# Altium PCB v009 pcb.PCBDOC
Units mm, origin at the board's own origin, x right, y up, seen from the top; angles counter-clockwise.
Board outline 21.5 x 5.6 mm, 2 copper layers (Top Layer, Bottom Layer); 12 components, 30 nets, 84 pads, 35 vias.
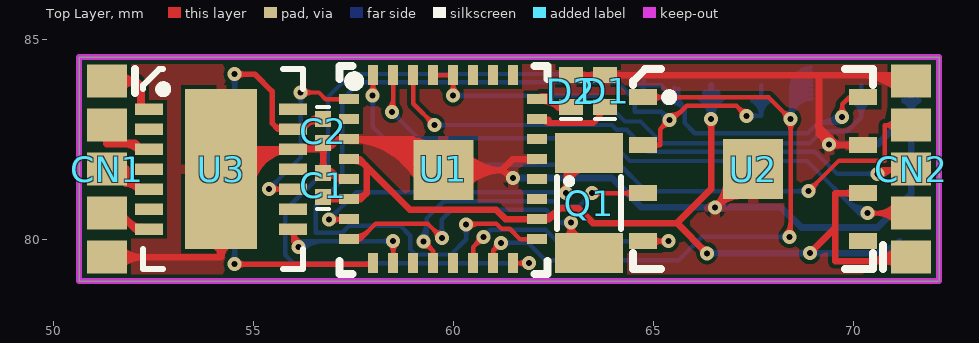
[diagram p0: Top Layer view]
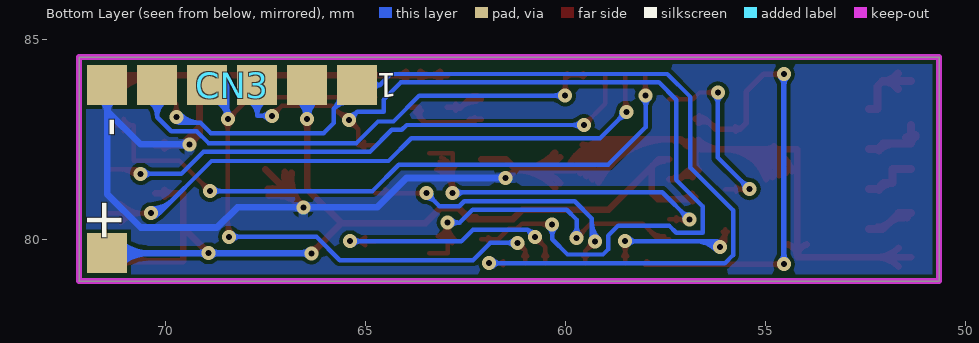
[diagram p1: Bottom Layer view, seen from below]

## Layer stack, top to bottom
Top Layer: signal copper 0.0356
Dielectric: core 0.32, FR-4, Dk 4.8
Bottom Layer: signal copper 0.0356

## Board outline
50.65,78.95 72.15,78.95 72.15,84.55 50.65,84.55

## Design rules (kind name [scope] priority, off if disabled: settings)
Clearance Clearance_Pad [All vs IsPad] p1: gap=0.1
Clearance Clearance_Via [(IsVia) vs (IsVia)] p2 off: gap=0.1
Clearance Polygon [InPoly vs IsPad] p3: gap=0.1
Clearance [All] p4: gap=0.1
DiffPairsRouting [All] p1: maxlimit=0.2 minlimit=0.2 mostfreqgap=0.2 maxuncoupledlength=0.2
FabricationTestPointUsage TestPointUsage [All] p1: valid=0 allowmultiple=FALSE
FabricationTestpoint Testpoint [All] p1: side=3 testpointundercomponent=TRUE minsize=1.016 maxsize=2.54 preferedsize=1.524 minholesize=0 maxholesize=1.016 preferedholesize=0.813 testpointgrid=0.025 allowsidetop=TRUE allowsidebottom=TRUE usegrid=TRUE gridtolerance=0
HoleSize [All] p1: absolutevalues=TRUE maxlimit=2.54 minlimit=0.15 maxpercent=80.000 minpercent=20.000
HoleToHoleClearance [All] p1: gap=0.15 allowstackedmicrovias=FALSE
MinimumAnnularRing [All] p1: minimumring=0.1
MinimumSolderMaskSliver [All] p1 off: minsoldermaskwidth=0.1
PolygonConnect [All] p1: connectstyle=Relief reliefconductorwidth=0.254 reliefentries=4 polygonreliefangle="90 Angle"
RoomDefinition "v009 schematics" [InComponentClass('v009 schematics')] p1: confinementstyle=ConfineIn formatcopy=TRUE lockcomponents=FALSE outline 48.05,77.9 73.1,77.9 73.1,85.4 48.05,85.4
RoutingCorners [All] p1: cornerstyle=Round minsetback=1 maxsetback=1
RoutingVias [All] p1: holewidth=0.15 width=0.35 viastyle="Through Hole" minholewidth=0.15 minwidth=0.35 maxholewidth=0.15 maxwidth=0.35
SMDNeckDown [All] p1: percent=100.000
SilkscreenOverComponentPads [All] p1 off: minsilkscreentomaskgap=0.254
SolderMaskExpansion SolderMaskExpansion_1 [(IsVia)] p1: expansion=-0.2
SolderMaskExpansion [All] p2: expansion=0.02
Width Width_3 [(InNet('PD5') OR InNet('PC0') OR InNet('PC1') OR InNet('NetGreen Led_1'))] p1: maxlimit=0.14 minlimit=0.14 preferedwidth=0.14
Width Width_2 [(InNet('HEAD 1') OR InNet('HEAD 2') OR InNet('HEAD 3') OR InNet('HCOMMON'))] p2: maxlimit=0.2 minlimit=0.2 preferedwidth=0.2
Width Width_1 [(InNet('GND') OR InNet('VCC'))] p3: maxlimit=0.17 minlimit=0.17 preferedwidth=0.17
Width [All] p4: maxlimit=0.11 minlimit=0.11 preferedwidth=0.11
20 further rules are at their usual default settings.

## Components (designator, comment, footprint, x,y, rotation, side; value= is the part's Value field where it differs from the comment)
+ "No component mounted" SU01LS 71.5,79.3 r0 bottom (schematic designator VCC)
C1 "100nF" CC0603(0201) 56.6,81.05 r90 top
C2 "100nF" CC0603(0201) 56.9,83 r270 top
CN1 "5pin smd" "SU05LSR WIDE" 51.35,83.95 r270 top
CN2 "5pin smd" "SU05LSR WIDE" 71.45,79.55 r90 top
CN3 "No component mounted" "SU06LST FULL" 64.6,83.25 r0 bottom
D1 "LED1" CC1005(0402) 63.55,83.2 r90 top
D2 "LED1" CC1005(0402) 62.7,83.2 r90 top
Q1 "32.768khz crystal 1.5 x 3.2mm" "QUARTZ SMD (SMALL)" 64.3,82.65 r270 top
U1 "ATMEL ATMEGA168V-10MU-ND" "32M1-A L 3" 57.15,84.35 r0 top
U2 "ATMEL 4MBit DataFlash" "8M1-A MLF 3" 64.5,84.25 r0 top
U3 "Asic 3V MLF14" "DELTA ASIC - 5" 56.25,84.25 r270 top

## Footprints (in the part's own frame and the unit in brackets; to place one, negate y for a bottom-side part, rotate by r counter-clockwise, add the part's x,y. Pads: shape width x height; smd on the part's side, far side on the other; paste and mask are expansions set on the pad)
"8M1-A MLF 3" [mm] "for at45db161d"
  rect 0.7x0.4 smd: 1(0.25,-0.7) 2(0.25,-1.9) 3(0.25,-3.1) 4(0.25,-4.3) 5(5.75,-4.3) 6(5.75,-3.1) 7(5.75,-1.9) 8(5.75,-0.7)
  rect 1.5x1.5 smd: 9(3,-2.5)
  silkscreen extent 0,-5 6,0, body extent 0,-5 6,0, height 1
"32M1-A L 3" [mm] "atmel uc modified"
  rect 0.5x0.25 smd: 1(0.25,-0.85) 2(0.25,-1.35) 3(0.25,-1.85) 4(0.25,-2.35) 5(0.25,-2.85) 6(0.25,-3.35) 7(0.25,-3.85) 8(0.25,-4.35) 17(4.95,-4.35) 18(4.95,-3.85) 19(4.95,-3.35) 20(4.95,-2.85) 21(4.95,-2.35) 22(4.95,-1.85) 23(4.95,-1.35) 24(4.95,-0.85)
  rect 0.25x0.5 smd: 9(0.85,-4.95) 10(1.35,-4.95) 11(1.85,-4.95) 12(2.35,-4.95) 13(2.85,-4.95) 14(3.35,-4.95) 15(3.85,-4.95) 16(4.35,-4.95) 25(4.35,-0.25) 26(3.85,-0.25) 27(3.35,-0.25) 28(2.85,-0.25) 29(2.35,-0.25) 30(1.85,-0.25) 31(1.35,-0.25) 32(0.85,-0.25)
  rect 1.5x1.5 smd: 33(2.607,-2.624)
  silkscreen extent 0.01,-5.22 5.21,-0.02, body extent 0.1,-5.1 5.1,-0.1, height 1
CC0603(0201) [mm]
  rect 0.4x0.4 smd: 1(0,-0.15) 2(0.6,-0.15)
  silkscreen extent -0.3,-0.3 -0.3,0, body extent 0,-0.3 0.6,0, height 1
CC1005(0402) [mm]
  rect 0.4x0.6 smd: 1(0.1,-0.25) 2(0.9,-0.25)
  silkscreen extent -0.2,-0.5 -0.2,0, body extent 0,-0.5 1,0, height 1
"DELTA ASIC - 5" [mm]
  rect 0.28x0.7 smd: 1(1,-3.85) 2(1.5,-3.85) 3(2,-3.85) 4(2.5,-3.85) 5(3,-3.85) 6(3.5,-3.85) 7(4,-3.85) 8(4,-0.25) 9(3.5,-0.25) 10(3,-0.25) 11(2.5,-0.25) 12(2,-0.25) 13(1.5,-0.25) 14(1,-0.25)
  rect 4x1.8 smd: 15(2.5,-2.05)
  silkscreen extent 0,-4 5,0, body extent 0,-4 5,0, height 0.7
"QUARTZ SMD (SMALL)" [mm] "CC7V-T1A"
  rect 1x1.7 smd: 1(0.5,-0.9) 2(3,-0.9)
  silkscreen extent 1.1,-1.7 2.4,-0.1, body extent 0.1,-1.65 3.3,-0.15, height 0.5
SU01LS [mm]
  rect 1x1 smd: 1(-0.05,-0.35)
"SU05LSR WIDE" [mm] "0.95mm spacing"
  rect 0.825x1 smd: 1(0,0) 2(1.1,0) 3(2.2,0) 4(3.3,0) 5(4.4,0)
  silkscreen extent -0.3,0.7 0.3,0.7
"SU06LST FULL" [mm]
  rect 1x1 smd: 1(0.6,-0.6) 2(1.85,-0.6) 3(3.1,-0.6) 4(4.35,-0.6) 5(5.6,-0.6) 6(6.85,-0.6)

## Part data
+: library part "1pin smd"
C1 C2: library part Cap, "100nf Capacitor - Footprint CC0603 (0201)"
CN1 CN2: "No component mounted"
CN3: library part "6pin smd"
D1: library part LED3, "LED 0402 GREEN 465NM TRANSPARENT"
D2: library part LED3, "LED 0402 RED 465NM TRANSPARENT"
Q1: library part "2pin smd", "CRYSTAL 32.768KHZ 1.5 x 3.2mm"
U1: library part ATmega8L-8MC, "ATMEL ATMEGA168V-10MU"
U2: library part at45db041b
U3: library part "delta asic 3volt"

## Via types
v1: diameter 0.35, hole 0.15, Top Layer to Bottom Layer, 35 vias

## Nets (pads, with @x,y where several pads share a name; then routed paths per layer and width w, separated by ;. In a path a pad name is that pad's centre, name@x,y a point inside that pad or via, vN(x,y) a via of type N, cw(c..) or ccw(c..) an arc to the next point about the centre after c; other vN are vias at no path point)
ADC6: U1.19
ADC7: U1.22
GND: C1.2 C2.2 CN1.5 CN2.5 CN3.6 D1.2 D2.2 U1.3 U1.5 U1.21 U1.33 U2.7 U2.9 U3.12 U3.15 | length 85.1
  Top Layer w0.17: CN1.5 54.2,79.55 ; CN1.5@51.669,79.318 cw(c52.228,78.759) 52.228,79.55 cw(c52.228,80.341) CN1.5@51.669,79.782 ; U3.15@53.963,79.87 cw(c53.865,79.55) 54.2,79.55 ; U3.15@54.329,81.709 cw(c55.069,81.473) U3.15@55.069,82.25 ; U3.15@54.437,79.87 ccw(c54.535,79.55) 54.2,79.55 ; U3.15@54.491,81.657 cw(c55.302,81.398) 55.302,82.25 ; U3.15@54.653,81.606 cw(c55.535,81.324) 55.535,82.25 ; U3.15@54.776,82.326 ccw(c54.961,82.511) U3.15@54.961,82.25 ; U3.15@54.814,81.554 cw(c55.767,81.25) U3.12@55.767,82.25 ; U3.15@54.976,81.502 cw(c56,81.176) U3.12 ; U3.12@56.11,82.25 ccw(c56.11,83.04) C2.2@56.669,82.481 ; 56.52,82.25 ccw(c56.52,82.63) C2.2@56.789,82.361 ; C1.2@56.669,81.731 ccw(c56.472,81.928) 56.75,81.928 ccw(c57.028,81.928) C1.2@56.831,81.731 ; C2.2@56.669,82.319 cw(c56.472,82.122) 56.75,82.122 cw(c57.028,82.122) C2.2@56.831,82.319 ; C2.2@56.714,82.358 ccw(c56.847,82.515) 56.992,82.37 ; C1.2@56.719,81.695 cw(c56.833,81.528) 56.976,81.671 ; C1.2@56.741,81.704 cw(c56.798,81.368) 57.038,81.609 ; C1.2@56.815,81.555 cw(c56.951,81.356) 57.121,81.526 ; C2.2@56.824,82.488 ccw(c56.967,82.656) 57.123,82.5 ; C2.2@56.832,82.32 cw(c57.023,82.134) 57.023,82.4 ; C2.2@56.832,82.48 ccw(c57.023,82.666) 57.023,82.4 ; C1.2@56.838,81.576 cw(c56.998,81.441) 56.998,81.65 ; C1.2@56.838,81.724 ccw(c56.998,81.859) 56.998,81.65 ; 57.047,82.424 cw(c57.182,82.289) U1.3@57.259,82.463 ; 57.061,81.586 ccw(c57.201,81.726) U1.5@57.263,81.538 ; U1.5 57.148,81.5 56.998,81.65 ; 57.679,82.5 cw(c57.679,80.658) U1.33@59.317,81.5 ; 57.957,82.5 cw(c57.957,80.801) U1.33@59.468,81.577 ; 58.235,82.5 cw(c58.235,80.944) U1.33@59.619,81.655 ; 58.514,82.5 cw(c58.514,81.087) U1.33@59.77,81.733 ; 58.792,82.5 cw(c58.792,81.23) U1.33@59.922,81.811 ; U1.33@59.123,81.927 ccw(c58.581,82.098) 58.983,82.5 ; U1.33@59.165,81.422 ccw(c57.4,80.515) U1.3 ; U1.33@59.285,81.875 ccw(c58.882,82.003) 59.181,82.302 ccw(c59.48,82.601) U1.33@59.608,82.198 ; U1.33@59.556,82.36 cw(c59.385,82.902) 58.983,82.5 ; U1.33@60.13,81.401 cw(c60.845,80.777) 60.845,81.726 cw(c60.845,82.675) U1.33@60.13,82.051 ; U1.33@60.258,81.289 cw(c61.219,80.451) 61.219,81.726 ; U1.33@60.258,82.163 ccw(c61.219,83.001) 61.219,81.726 ; v1@61.405,81.518 ccw(c61.191,81.481) 61.315,81.659 ccw(c61.44,81.837) v1@61.478,81.623 ; v1(61.493,81.534) 61.219,81.726 ; U1.21 61.493,82 61.219,81.726 ; D2.2 63.398,84.1 63.85,84.1 67.846,84.1 71.3,84.1 CN2.5 ; D2.2@63.131,84.019 cw(c63.328,83.822) 63.328,84.1 cw(c63.328,84.378) D2.2@63.131,84.181 ; 63.422,84.1 ccw(c63.422,84.378) D1.2@63.619,84.181 ; 63.423,84.1 cw(c63.423,83.823) D1.2@63.619,84.019 ; D1.2@63.981,84.019 cw(c64.177,83.823) 64.177,84.1 ; D1.2@63.981,84.181 ccw(c64.178,84.378) 64.178,84.1 ; v1@66.548,80.888 ccw(c66.548,81.105) 66.701,80.951 ccw(c66.855,80.798) v1@66.638,80.798 ; U2.9@66.841,81.662 cw(c65.819,81.527) v1(66.548,80.798) ; U2.9@67.009,81.685 cw(c66.248,81.584) 66.791,81.041 cw(c67.334,80.498) U2.9@67.435,81.259 ; U2.9@67.412,81.091 ccw(c67.277,80.069) v1(66.548,80.798) ; U2.9 v1(66.548,80.798) ; 69.119,82.827 cw(c68.664,82.372) 69.307,82.372 ccw(c69.09,82.372) 69.244,82.526 ccw(c69.397,82.679) v1@69.397,82.462 ; 69.143,84.1 69.143,82.803 ; v1(69.397,82.372) 69.143,82.626 69.143,82.803 ; v1@69.461,82.436 ccw(c69.668,82.643) 69.668,82.35 ; v1@69.474,82.419 ccw(c69.596,82.492) 69.596,82.35 ; U2.7@70.019,82.269 ccw(c69.822,82.072) 69.822,82.35 ccw(c69.822,82.628) U2.7@70.019,82.431 ; 70.21,84.1 cw(c70.21,82.797) CN2.5@71.131,83.718 ; U2.7 69.596,82.35 ; 70.62,84.1 cw(c70.62,83.208) CN2.5@71.251,83.839 ; 70.934,84.1 ccw(c70.934,84.379) CN2.5@71.131,84.182 ; 54.2,79.55 U3.15 54.2,82.25 U3.12 ; U3.12 56.6,82.25 C2.2 ; C2.2 57.023,82.4 ; C2.2 56.75,82.017 C1.2 56.998,81.65 ; 57.023,82.4 57.123,82.5 ; 57.123,82.5 U1.3 ; U1.3 58.983,82.5 ; 58.983,82.5 U1.33 61.219,81.726 ; 69.143,82.803 69.596,82.35
  Bottom Layer w0.17: v1(61.493,81.534) 63.966,81.534 64.702,80.798 v1(66.548,80.798) 68.199,80.798 68.707,80.289 70.612,80.289 71.45,81.127 71.45,83.21 ; v1@61.557,81.47 cw(c61.711,81.317) 61.711,81.534 cw(c61.711,81.751) v1@61.557,81.598 ; v1@66.484,80.734 ccw(c66.33,80.58) 66.33,80.798 ccw(c66.33,81.015) v1@66.484,80.861 ; v1@66.611,80.734 cw(c66.765,80.58) 66.765,80.798 cw(c66.765,81.015) v1@66.611,80.861 ; v1(69.397,82.372) 70.612,82.372 71.45,83.21 ; v1@69.461,82.309 cw(c69.614,82.155) 69.614,82.372 cw(c69.614,82.589) v1@69.461,82.436 ; CN3.6@71.281,83.471 cw(c71.164,83.21) 71.45,83.21 ; CN3.6 71.45,83.21 ; CN3.6@71.619,83.471 ccw(c71.736,83.21) 71.45,83.21
HCOMMON: CN1.1 U3.1 | length 2.6
  Top Layer w0.2: CN1.1 52.07,83.95 ; CN1.1@51.686,83.76 cw(c52.07,83.466) 52.07,83.95 ; CN1.1@51.686,84.14 ccw(c52.07,84.434) 52.07,83.95 ; U3.1 52.197,83.25 52.197,83.823 52.07,83.95
"HEAD 1": CN1.2 U3.3 | length 2.9
  Top Layer w0.2: CN1.2@51.239,82.558 cw(c51.179,82.398) 51.35,82.398 ; CN1.2@51.245,82.604 cw(c51.078,82.389) 51.35,82.389 cw(c51.503,82.389) CN1.2@51.481,82.541 ; CN1.2 51.35,82.398 ; CN1.2@51.461,82.558 ccw(c51.521,82.398) 51.35,82.398 ; 51.737,82.398 cw(c51.737,81.797) U3.3@52.162,82.222 ; U3.3 52.197,82.25 52.049,82.398 51.35,82.398
"HEAD 2": CN1.3 U3.5 | length 1.9
  Top Layer w0.2: CN1.3 51.816,81.75 CN1.3@51.816,81.407 ; U3.5@52.157,81.227 ccw(c51.816,80.994) CN1.3@51.816,81.407 ; U3.5 52.197,81.25 52.04,81.407 CN1.3@51.816,81.407
"HEAD 3": CN1.4 U3.7 | length 2
  Top Layer w0.2: CN1.4 51.664,80.65 52.064,80.25 U3.7 ; CN1.4@51.459,80.54 cw(c51.556,80.047) 51.912,80.402 ; 51.906,80.408 ccw(c52.19,80.692) U3.7@52.19,80.29
PB0: U1.12 U2.3 | length 9.9
  Top Layer w0.11: v1@59.258,79.827 cw(c59.258,79.538) 59.463,79.742 cw(c59.668,79.947) v1@59.378,79.947 ; v1(59.258,79.947) 59.5,79.705 U1.12 ; U1.12@59.451,79.574 ccw(c59.331,79.694) 59.5,79.694 ccw(c59.669,79.694) U1.12@59.55,79.574 ; v1(63.472,81.15) U2.3 ; v1@63.556,81.065 cw(c63.761,80.86) 63.761,81.15 cw(c63.761,81.44) v1@63.556,81.235 ; U2.3@64.497,81.047 ccw(c64.25,80.8) 64.25,81.15 ccw(c64.25,81.5) U2.3@64.497,81.253
  Bottom Layer w0.11: v1@59.173,80.032 ccw(c58.785,80.421) 59.334,80.421 ; v1@59.251,79.954 ccw(c59.05,80.155) 59.334,80.155 ; v1(59.258,79.947) 59.334,80.023 59.334,80.518 59.763,80.946 62.526,80.946 62.649,80.823 63.144,80.823 v1(63.472,81.15) ; v1@63.352,81.15 cw(c63.062,81.15) 63.267,80.945 cw(c63.472,80.74) v1@63.472,81.03
PB1: U1.13
PB2: U1.14 U2.4 | length 8.8
  Top Layer w0.11: U1.14@60.451,79.574 ccw(c60.331,79.694) 60.5,79.694 ccw(c60.669,79.694) U1.14@60.55,79.574 ; U1.14 60.5,79.804 v1(60.757,80.061) ; v1@60.637,80.061 cw(c60.347,80.061) 60.552,79.856 cw(c60.757,79.651) v1@60.757,79.941 ; U2.4 v1(65.38,79.95) ; U2.4@65.003,79.847 cw(c65.25,79.6) 65.25,79.95 cw(c65.25,80.3) U2.4@65.003,80.053 ; v1@65.295,79.865 ccw(c65.09,79.66) 65.09,79.95 ccw(c65.09,80.24) v1@65.295,80.035
  Bottom Layer w0.11: v1(60.757,80.061) 60.935,80.239 ; v1@60.769,80.18 ccw(c60.791,80.382) 60.935,80.239 ; v1@60.876,80.073 cw(c61.078,80.095) 60.935,80.239 ; v1@65.295,79.865 ccw(c65.09,79.66) 65.09,79.95 ccw(c65.09,80.24) v1@65.295,80.035 ; v1(65.38,79.95) 62.595,79.95 62.306,80.239 60.935,80.239
PB3: CN3.4 U1.15 U2.1 | length 26.7
  Top Layer w0.11: U1.15@60.95,79.574 ccw(c60.831,79.694) 61,79.694 ccw(c61.169,79.694) U1.15@61.049,79.574 ; U1.15 61,79.72 ; v1@61.069,79.901 cw(c60.833,79.887) 61,79.72 ; v1@61.181,79.789 ccw(c61.167,79.553) 61,79.72 ; v1(61.189,79.908) 61,79.72 ; U2.1 67.885,83.55 v1(68.434,83.001) 68.434,80.093 v1(68.402,80.061) ; U2.1@65.003,83.447 cw(c65.25,83.2) 65.25,83.55 cw(c65.25,83.9) U2.1@65.003,83.653 ; v1@68.314,83.001 ccw(c68.024,83.001) 68.229,83.206 ccw(c68.434,83.411) v1@68.434,83.121 ; v1@68.317,80.146 ccw(c68.036,80.427) 68.434,80.427 ; v1@68.349,82.916 cw(c68.144,82.711) 68.434,82.711 cw(c68.724,82.711) v1@68.519,82.916 ; 68.434,80.274 ccw(c68.615,80.274) v1@68.487,80.146
  Bottom Layer w0.11: v1(61.189,79.908) 61.874,79.908 62.306,79.477 65.634,79.477 66.218,80.061 v1(68.402,80.061) ; v1@61.273,79.824 cw(c61.478,79.619) 61.478,79.908 cw(c61.478,80.198) v1@61.273,79.993 ; v1@68.317,79.976 ccw(c68.112,79.771) 68.112,80.061 ccw(c68.112,80.351) v1@68.317,80.146 ; v1@68.349,83.086 ccw(c68.098,83.336) 68.453,83.336 ; v1(68.434,83.001) 68.453,83.02 68.453,83.85 CN3.4 ; v1@68.453,82.995 cw(c68.973,82.995) CN3.4@68.959,83.515 ; v1@68.453,83.108 cw(c68.97,83.108) CN3.4@68.956,83.625 ; 68.453,83.221 cw(c68.967,83.221) CN3.4@68.953,83.735 ; 68.453,83.245 ccw(c68.678,83.245) v1@68.519,83.086 ; 68.453,83.334 cw(c68.964,83.334) CN3.4@68.95,83.845 ; CN3.4@68.453,83.447 cw(c68.961,83.447) CN3.4@68.947,83.955 ; CN3.4@68.453,83.56 cw(c68.958,83.56) CN3.4@68.944,84.065 ; CN3.4@68.453,83.673 cw(c68.955,83.673) CN3.4@68.941,84.175 ; CN3.4@68.453,83.786 cw(c68.952,83.786) CN3.4@68.938,84.285
PB4: CN3.1 U1.16 U2.8 | length 31.4
  Top Layer w0.11: U1.16 v1(61.9,79.4) ; U1.16@61.55,79.35 cw(c61.67,79.23) 61.67,79.4 ; U1.16@61.55,79.449 ccw(c61.668,79.568) 61.668,79.4 ; v1@61.815,79.316 ccw(c61.61,79.111) 61.61,79.4 ccw(c61.61,79.69) v1@61.815,79.485 ; v1@69.638,83.143 ccw(c69.433,83.348) 69.723,83.348 ccw(c70.013,83.348) v1@69.808,83.143 ; v1(69.723,83.058) 69.723,83.372 69.901,83.55 U2.8 ; 69.768,83.418 cw(c70.022,83.164) U2.8@70.093,83.516
  Bottom Layer w0.11: v1@61.815,79.316 ccw(c61.61,79.111) 61.61,79.4 ccw(c61.61,79.69) v1@61.815,79.485 ; v1(61.9,79.4) 56.007,79.4 55.804,79.604 55.804,80.721 56.871,81.788 56.871,83.554 57.448,84.131 64.353,84.131 64.635,83.85 ; CN3.1@64.767,83.745 ccw(c64.635,83.713) 64.635,83.85 ; CN3.1@64.767,83.954 cw(c64.635,83.987) 64.635,83.85 ; CN3.1@65.267,83.522 cw(c65.349,83.116) 65.641,83.409 cw(c65.934,83.701) CN3.1@65.528,83.783 ; CN3.1@65.288,83.414 cw(c65.398,82.875) 65.786,83.264 ; CN3.1@65.636,83.761 ccw(c66.174,83.652) 65.786,83.264 ; 69.118,82.912 ccw(c69.118,83.614) v1@69.635,83.139 ; 69.368,82.912 ccw(c69.368,83.384) v1@69.716,83.065 ; 69.619,82.912 ccw(c69.619,83.154) v1@69.797,82.99 ; v1(69.723,83.058) 69.723,83.039 69.596,82.912 69.118,82.912 68.857,82.652 66.04,82.652 65.786,82.906 65.786,83.264 ; 64.635,83.85 CN3.1 65.786,83.264
PB5: CN3.3 U1.17 U2.2 | length 29.2
  Top Layer w0.11: v1(60.325,80.366) 60.35,80.391 61.079,80.391 61.21,80.26 61.411,80.26 61.671,80 U1.17 ; v1@60.41,80.281 cw(c60.676,80.015) 60.676,80.391 ; v1@60.41,80.45 ccw(c60.553,80.594) 60.553,80.391 ; U1.17@61.926,79.95 ccw(c61.806,79.831) 61.806,80 ccw(c61.806,80.169) U1.17@61.926,80.049 ; U2.2 65.176,82.35 ; U2.2@65.019,82.268 cw(c65.176,82.159) 65.176,82.35 ; U2.2@65.019,82.432 ccw(c65.176,82.541) 65.176,82.35 ; v1@65.285,82.982 cw(c64.995,82.982) 65.2,82.777 cw(c65.405,82.572) v1@65.405,82.862 ; v1@65.405,83.102 ccw(c65.405,83.575) 65.74,83.241 ; v1@67.215,83.083 ccw(c66.926,83.083) 67.131,83.288 ccw(c67.335,83.493) v1@67.335,83.203 ; v1(67.335,83.083) 67.081,83.337 65.837,83.337 65.443,82.944 v1(65.405,82.982) 65.176,82.753 65.176,82.35
  Bottom Layer w0.11: v1@60.24,80.281 cw(c60.035,80.076) 60.325,80.076 cw(c60.615,80.076) v1@60.41,80.281 ; v1(60.325,80.366) 60.325,79.998 59.944,79.617 59.055,79.617 58.928,79.744 58.928,80.086 58.674,80.34 57.404,80.34 57.226,80.163 56.566,80.163 56.566,80.823 57.226,81.483 57.226,83.49 57.658,83.921 64.108,83.921 64.541,83.488 64.541,83.185 65.202,83.185 ; v1@65.285,82.982 ccw(c65.001,82.984) 65.202,83.185 ; v1@65.404,83.102 cw(c65.403,83.386) 65.202,83.185 ; v1(65.405,82.982) 65.202,83.185 ; v1(67.335,83.083) 67.7,83.083 ; v1@67.42,82.999 cw(c67.625,82.794) 67.625,83.083 cw(c67.625,83.373) v1@67.42,83.168 ; CN3.3@67.479,83.463 cw(c67.262,83.083) 67.7,83.083 ; CN3.3@67.534,83.559 cw(c67.371,83.273) 67.7,83.273 cw(c68.029,83.273) CN3.3@67.866,83.559 ; CN3.3 67.7,83.083 ; CN3.3@67.921,83.463 ccw(c68.138,83.083) 67.7,83.083
PC0: D1.1 U1.23 | length 3.4
  Top Layer w0.14: U1.23 62.382,83 62.382,82.906 ; U1.23@62.264,82.961 cw(c62.358,82.867) 62.358,83 cw(c62.358,83.133) 62.264,83.039 ccw(c62.586,83.361) 62.586,82.906 ; U1.23@62.28,83.003 ccw(c62.382,83.008) 62.382,82.906 ; 63.597,83.003 ccw(c63.489,83.111) D1.1@63.603,83.213 ; D1.1@63.608,83.208 cw(c63.501,83.101) D1.1@63.652,83.101 ; 63.652,83.053 cw(c63.783,83.053) D1.1@63.741,83.177 ; D1.1@63.85,83.3 63.652,83.3 63.652,83.058 63.5,82.906 62.382,82.906
PC1: D2.1 U1.24 | length 2.6
  Top Layer w0.14: U1.24 62.408,83.5 62.608,83.3 ; U1.24@62.188,83.576 cw(c62.254,83.441) 62.36,83.548 ; U1.24@62.225,83.445 cw(c62.225,82.871) 62.631,83.277 ; U1.24@62.225,83.585 cw(c62.225,83.349) 62.392,83.516 ; U1.24@62.249,83.451 cw(c62.345,83.254) 62.499,83.409 ; U1.24@62.264,83.461 cw(c62.358,83.367) 62.358,83.5 cw(c62.358,83.633) U1.24@62.264,83.539 ; D2.1@62.742,83.228 ccw(c62.608,83.14) 62.608,83.3 ; D2.1@62.742,83.372 cw(c62.608,83.461) 62.608,83.3 ; D2.1 62.608,83.3
PC2: U1.25
PC3: U1.26
PC4: U1.27
PD2: CN2.4 U1.32 | length 19.3
  Top Layer w0.11: v1@57.903,83.676 ccw(c57.67,83.91) U1.32@58,83.91 ; U1.32@57.95,83.926 cw(c57.831,83.806) 58,83.806 cw(c58.169,83.806) U1.32@58.049,83.926 ; v1(57.988,83.591) 58,83.603 U1.32 ; U1.32@58,83.853 ccw(c58.249,83.853) v1@58.073,83.676 ; v1(68.885,81.204) 69.647,81.966 70.79,81.966 70.79,82.85 ; v1@68.885,81.324 ccw(c68.885,81.614) 69.09,81.409 ccw(c69.295,81.204) v1@69.005,81.204 ; CN2.4@71.041,82.693 ccw(c70.79,82.57) 70.79,82.85 ; CN2.4@71.041,83.007 cw(c70.79,83.13) 70.79,82.85 ; CN2.4 70.79,82.85
  Bottom Layer w0.11: v1@57.903,83.507 cw(c57.698,83.302) 57.988,83.302 cw(c58.278,83.302) v1@58.073,83.507 ; v1(57.988,83.591) 57.988,82.804 58.928,81.864 64.16,81.864 64.821,81.204 v1(68.885,81.204) ; v1@68.8,81.119 ccw(c68.595,80.914) 68.595,81.204 ccw(c68.595,81.494) v1@68.8,81.289
PD3: U1.1 U3.10 | length 7
  Top Layer w0.11: v1(55.397,81.255) 55.402,81.25 U3.10 ; v1@55.482,81.17 cw(c55.676,80.976) U3.10@55.676,81.25 ; v1@55.482,81.339 ccw(c55.698,81.555) U3.10@55.698,81.25 ; U3.10@55.73,81.19 ccw(c55.585,81.045) 55.585,81.25 ccw(c55.585,81.455) U3.10@55.73,81.31 ; v1(56.185,83.668) 56.642,83.668 56.81,83.5 U1.1 ; v1@56.27,83.583 cw(c56.475,83.378) 56.475,83.668 cw(c56.475,83.957) v1@56.27,83.752 ; U1.1@57.225,83.451 ccw(c57.106,83.331) 57.106,83.5 ccw(c57.106,83.669) U1.1@57.225,83.55
  Bottom Layer w0.11: v1(55.397,81.255) 56.185,82.042 v1(56.185,83.668) ; v1@55.397,81.375 ccw(c55.397,81.664) 55.602,81.459 ccw(c55.807,81.255) v1@55.517,81.255 ; v1@56.1,83.583 cw(c55.895,83.378) 56.185,83.378 cw(c56.475,83.378) v1@56.27,83.583
PD4: U1.2
PD5: C2.1 U1.9 U3.13 | length 15.5
  Top Layer w0.14: v1(54.534,79.375) 58,79.375 U1.9 ; v1(54.534,84.125) 55.042,84.125 55.474,83.693 55.474,82.902 55.626,82.75 ; v1@54.608,79.301 cw(c54.787,79.122) 54.787,79.375 cw(c54.787,79.628) v1@54.608,79.449 ; v1@54.608,84.051 cw(c54.787,83.871) 54.787,84.125 cw(c54.787,84.378) v1@54.608,84.199 ; 55.556,82.82 ccw(c55.66,82.925) U3.13@55.748,82.806 ; U3.13@55.739,82.702 ccw(c55.626,82.593) 55.626,82.75 ; U3.13@55.739,82.798 cw(c55.626,82.907) 55.626,82.75 ; U3.13@56.21,82.82 ccw(c56.21,83.051) 56.373,82.888 ; U3.13@56.331,82.845 cw(c56.73,82.446) C2.1@56.75,83.01 ; 56.354,82.868 cw(c56.53,82.692) C2.1@56.674,82.894 ; 56.47,82.985 cw(c56.627,82.828) C2.1@56.756,83.008 ; C2.1@56.647,82.921 ccw(c56.486,82.796) 56.486,83 ; C2.1@56.647,83.079 cw(c56.486,83.204) 56.486,83 ; C2.1 56.486,83 ; 57.807,79.375 ccw(c57.807,79.593) U1.9@57.961,79.439 ; 55.626,82.75 U3.13 56.236,82.75 56.486,83
  Bottom Layer w0.14: v1@54.46,79.449 ccw(c54.28,79.628) 54.534,79.628 ccw(c54.787,79.628) v1@54.608,79.449 ; v1@54.46,84.051 cw(c54.28,83.871) 54.534,83.871 cw(c54.787,83.871) v1@54.608,84.051 ; v1(54.534,79.375) v1(54.534,84.125)
PD6: U1.10 U3.8 | length 6.9
  Top Layer w0.11: U3.8@55.94,80.19 cw(c55.795,80.045) 56,80.045 cw(c56.205,80.045) U3.8@56.06,80.19 ; 56,80.058 ccw(c56.281,80.058) v1@56.139,79.815 ; v1(56.134,79.807) 56,79.941 U3.8 ccw(c56.394,80.25) v1@56.195,79.91 ; v1@58.415,79.868 cw(c58.21,79.663) 58.5,79.663 cw(c58.79,79.663) v1@58.585,79.868 ; U1.10@58.451,79.574 ccw(c58.331,79.694) 58.5,79.694 ccw(c58.669,79.694) U1.10@58.55,79.574 ; U1.10 v1(58.5,79.953)
  Bottom Layer w0.11: v1@56.063,79.878 cw(c56.245,79.696) 56.245,79.953 ; v1(56.134,79.807) 56.28,79.953 v1(58.5,79.953) ; v1@56.141,79.8 cw(c56.51,79.431) 56.51,79.953 ; v1@56.219,79.722 cw(c56.776,79.165) 56.776,79.953 ; v1@58.415,79.868 ccw(c58.21,79.663) 58.21,79.953 ccw(c58.21,80.242) v1@58.415,80.037
PD7: U1.11
RST: CN3.5 U1.28 U1.29 | length 16.2
  Top Layer w0.11: U1.29 U1.28 v1(60,83.591) ; U1.29@59.55,84.051 cw(c59.669,83.931) 59.669,84.1 cw(c59.669,84.269) U1.29@59.55,84.15 ; v1@59.915,83.676 ccw(c59.71,83.881) 60,83.881 ccw(c60.29,83.881) v1@60.085,83.676 ; U1.28@59.95,83.926 cw(c59.831,83.806) 60,83.806 cw(c60.169,83.806) U1.28@60.049,83.926 ; U1.28@59.95,84.051 ccw(c59.831,83.931) 59.831,84.1 ccw(c59.831,84.269) U1.28@59.95,84.15
  Bottom Layer w0.11: v1(60,83.591) 63.646,83.591 64.294,82.944 64.681,82.944 65.221,82.404 68.917,82.404 69.215,82.702 69.85,82.702 70.2,83.052 ; v1@60.085,83.507 cw(c60.29,83.302) 60.29,83.591 cw(c60.29,83.881) v1@60.085,83.676 ; CN3.5@69.966,83.471 cw(c69.707,83.052) 70.2,83.052 ; CN3.5@70.024,83.565 cw(c69.829,83.249) 70.2,83.249 cw(c70.571,83.249) CN3.5@70.376,83.565 ; CN3.5 70.2,83.052 ; CN3.5@70.434,83.471 ccw(c70.693,83.052) 70.2,83.052
RX: CN2.3 U1.30 | length 16.4
  Top Layer w0.11: U1.30@58.95,83.926 cw(c58.831,83.806) 59,83.806 cw(c59.169,83.806) U1.30@59.049,83.926 ; U1.30 59,83.388 v1(59.533,82.855) ; v1@59.413,82.855 ccw(c59.124,82.855) 59.329,83.06 ccw(c59.533,83.265) v1@59.533,82.975 ; v1(70.612,81.636) 70.726,81.75 CN2.3 ; v1@70.619,81.629 cw(c70.912,81.335) 70.912,81.75 ; v1@70.697,81.551 cw(c71.178,81.07) CN2.3@71.178,81.75
  Bottom Layer w0.11: v1(59.533,82.855) 63.963,82.855 64.084,82.734 64.334,82.734 64.88,82.188 69.044,82.188 69.596,81.636 v1(70.612,81.636) ; v1@59.618,82.77 cw(c59.823,82.565) 59.823,82.855 cw(c59.823,83.145) v1@59.618,82.94 ; v1@70.527,81.551 ccw(c70.322,81.346) 70.322,81.636 ccw(c70.322,81.925) v1@70.527,81.72
TOSC1: Q1.1 U1.7 | length 13.2
  Top Layer w0.11: v1(56.896,80.493) 56.903,80.5 U1.7 ; v1@56.981,80.408 cw(c57.203,80.185) U1.7@57.203,80.5 ; v1@56.981,80.577 ccw(c57.168,80.765) U1.7@57.168,80.5 ; U1.7@57.225,80.45 ccw(c57.106,80.331) 57.106,80.5 ccw(c57.106,80.669) U1.7@57.225,80.549 ; v1@62.729,81.238 ccw(c62.524,81.443) 62.814,81.443 ccw(c63.104,81.443) v1@62.899,81.238 ; Q1.1@62.735,81.835 cw(c62.545,81.645) 62.814,81.645 ; v1@62.814,81.126 cw(c63.48,81.126) Q1.1@63.222,81.74 ; v1(62.814,81.153) 62.814,82.15 Q1.1 ; v1@62.814,81.291 cw(c63.411,81.291) Q1.1@63.18,81.841 ; 62.814,81.457 cw(c63.341,81.457) Q1.1@63.137,81.943 ; 62.814,81.622 cw(c63.272,81.622) Q1.1@63.095,82.044
  Bottom Layer w0.11: v1(56.896,80.493) 57.576,81.173 62.709,81.173 62.729,81.153 v1(62.814,81.153) ; v1@56.896,80.613 ccw(c56.896,80.902) 57.101,80.697 ccw(c57.306,80.493) v1@57.016,80.493 ; 62.477,81.173 cw(c62.477,80.816) v1@62.729,81.068 ; 62.572,81.173 ccw(c62.572,81.396) v1@62.729,81.238
TOSC2: Q1.2 U1.8 | length 12.1
  Top Layer w0.11: U1.8 57.673,80 ; U1.8@57.525,79.96 ccw(c57.525,80.222) 57.71,80.037 ; U1.8@57.525,80.07 ccw(c57.525,80.597) 57.898,80.224 ; U1.8@57.579,79.955 cw(c57.673,79.878) 57.673,80 ; U1.8@57.579,80.045 ccw(c57.673,80.122) 57.673,80 ; v1@59.595,80.035 ccw(c59.306,80.035) 59.511,80.24 ccw(c59.715,80.445) v1@59.715,80.155 ; v1(59.715,80.035) 59.36,80.391 58.064,80.391 57.673,80 ; Q1.2@62.749,79.977 ccw(c62.345,80.416) v1(62.941,80.416) ; Q1.2@62.823,79.896 ccw(c62.575,80.166) 62.941,80.166 ; v1@62.856,80.332 cw(c62.651,80.127) 62.941,80.127 cw(c63.231,80.127) v1@63.026,80.332 ; v1@62.941,80.264 ccw(c63.253,80.264) Q1.2@63.155,79.968 ; Q1.2@63.19,80.072 cw(c63.303,80.416) v1(62.941,80.416) ; Q1.2 62.941,79.65 v1(62.941,80.416)
  Bottom Layer w0.11: v1@59.631,80.12 ccw(c59.426,80.325) 59.715,80.325 ccw(c60.005,80.325) v1@59.8,80.12 ; v1(59.715,80.035) 59.715,80.491 59.961,80.736 62.316,80.736 62.636,80.416 v1(62.941,80.416) ; v1@62.856,80.332 ccw(c62.651,80.127) 62.651,80.416 ccw(c62.651,80.706) v1@62.856,80.501
TX: CN2.2 U1.31 | length 20.4
  Top Layer w0.11: v1@58.386,83.27 ccw(c58.111,83.545) 58.5,83.545 ; U1.31@58.451,83.926 cw(c58.331,83.806) 58.5,83.806 cw(c58.669,83.806) U1.31@58.55,83.926 ; v1(58.471,83.185) 58.5,83.214 U1.31 ; 58.5,83.404 ccw(c58.69,83.404) v1@58.556,83.27 ; v1(70.358,80.65) CN2.2 ; v1@70.443,80.565 cw(c70.648,80.36) 70.648,80.65 cw(c70.648,80.94) v1@70.443,80.735 ; CN2.2@71.11,80.397 ccw(c70.499,79.787) 70.499,80.65 ccw(c70.499,81.513) CN2.2@71.11,80.903 ; CN2.2@71.188,80.475 ccw(c70.765,80.052) 70.765,80.65 ccw(c70.765,81.247) CN2.2@71.188,80.825
  Bottom Layer w0.11: v1@58.471,83.065 cw(c58.471,82.775) 58.676,82.98 cw(c58.881,83.185) v1@58.591,83.185 ; v1(58.471,83.185) 59.131,82.525 63.85,82.525 64.418,81.956 68.844,81.956 70.15,80.65 ; 69.798,81.002 ccw(c70.358,81.562) v1@70.358,80.77 ; 69.986,80.814 ccw(c70.358,81.187) v1@70.358,80.66 ; 70.173,80.626 ccw(c70.358,80.811) v1@70.358,80.55 ; v1@70.254,80.59 ccw(c70.15,80.529) 70.15,80.65 ; v1@70.254,80.71 cw(c70.15,80.771) 70.15,80.65 ; v1(70.358,80.65) 70.15,80.65
VCC: +.1 C1.1 CN2.1 CN3.2 U1.4 U1.6 U1.18 U2.6 | length 37.4
  Top Layer w0.17: C1.1 57.032,81 ; C1.1@56.816,80.956 cw(c56.975,80.728) 57.023,81.001 cw(c57.072,81.275) C1.1@56.844,81.116 ; C1.1@56.831,81.131 ccw(c57.148,81.448) 57.148,81 ; C1.1@56.85,81.106 ccw(c57.032,81.208) 57.032,81 ; U1.4 57.658,82 57.836,81.822 ; U1.4@57.525,81.96 cw(c57.525,81.542) 57.82,81.838 ; U1.6@57.528,81.04 ccw(c57.56,81.429) 57.836,81.153 ; U1.4@57.542,81.964 cw(c57.612,81.821) 57.725,81.933 ; U1.18@62.225,80.54 ccw(c62.225,81.034) 62.575,80.685 ; v1@66.255,79.647 ccw(c66.038,79.647) 66.191,79.801 ccw(c66.345,79.954) v1@66.345,79.737 ; v1(66.345,79.647) 65.592,80.4 ; v1@66.386,82.938 cw(c66.233,82.784) 66.45,82.784 cw(c66.667,82.784) v1@66.514,82.938 ; v1(66.45,83.001) 66.45,81.258 65.592,80.4 ; v1(68.915,79.65) 69.532,80.268 ; v1@68.915,79.74 ccw(c68.915,79.957) 69.069,79.804 ccw(c69.222,79.65) v1@69.005,79.65 ; U2.6@70.019,81.069 ccw(c69.822,80.872) 69.822,81.15 ccw(c69.822,81.428) U2.6@70.019,81.231 ; U2.6 69.55,81.15 69.55,79.45 71.35,79.45 CN2.1 ; 70.33,79.45 ccw(c70.33,80.582) CN2.1@71.131,79.782 ; 70.741,79.45 ccw(c70.741,80.172) CN2.1@71.251,79.661 ; 70.813,79.45 cw(c70.813,79.001) CN2.1@71.131,79.318 ; 57.032,81 U1.6 57.683,81 57.836,81.153 ; 57.836,81.153 57.836,81.822 ; 57.836,81.822 58.922,80.736 61.073,80.736 61.309,80.5 61.976,80.5 U1.18 62.39,80.5 62.666,80.776 63.119,80.776 63.495,80.4 65.592,80.4
  Bottom Layer w0.17: CN3.2@66.195,83.522 cw(c65.79,83.001) v1(66.45,83.001) ; CN3.2@66.3,83.657 cw(c66.06,83.349) 66.45,83.349 cw(c66.84,83.349) CN3.2@66.6,83.657 ; v1(66.345,79.647) 66.348,79.65 v1(68.915,79.65) +.1 ; v1@66.386,83.065 ccw(c66.233,83.218) 66.45,83.218 ccw(c66.667,83.218) v1@66.514,83.065 ; v1@66.408,79.583 cw(c66.57,79.422) 66.57,79.65 ; v1@66.408,79.711 ccw(c66.555,79.857) 66.555,79.65 ; CN3.2 v1(66.45,83.001) ; CN3.2@66.705,83.522 ccw(c67.11,83.001) v1(66.45,83.001) ; v1@68.851,79.586 ccw(c68.698,79.433) 68.698,79.65 ccw(c68.698,79.867) v1@68.851,79.714 ; v1@68.979,79.586 cw(c69.132,79.433) 69.132,79.65 cw(c69.132,79.867) v1@68.979,79.714 ; +.1@71.157,79.357 ccw(c70.448,78.648) 70.448,79.65 ccw(c70.448,80.652) +.1@71.157,79.943 ; +.1@71.277,79.477 ccw(c70.859,79.059) 70.859,79.65 ccw(c70.859,80.242) +.1@71.277,79.823
pads on no net: U1.20 U2.5 U3.2 U3.4 U3.6 U3.9 U3.11 U3.14

## Polygon pours and split planes (outlines as drawn)
GND on Top Layer "Top Layer-No Net" (solid, remove dead copper, pour order 1001): 50.65,84.55 72.05,84.55 72.05,78.95 50.65,78.95
GND on Bottom Layer "Top Layer-No Net" (solid, pour order 1000): 50.673,84.5 72.073,84.5 72.073,78.9 50.673,78.9

## Keep-outs
Keep-Out Layer:
  the board outline again, w0.15

## Silkscreen, mask and mechanical layers (free items; w line width, h text height)
Bottom Overlay:
  text "-" at 70.95,83.05 h1 r270

## Dimensions
50.65,78.95 to 50.65,84.55 on Mechanical 1
50.65,78.95 to 72.15,78.95 on Mechanical 1

## Text inside footprints (layer, text, board x,y; h text height)
CN3: Bottom Overlay "1" at 64.2,84.15 h0.6 r180